# Altium PCB PiTopConn.PcbDoc
Units mm, origin at the board's own origin, x right, y up, seen from the top; angles counter-clockwise.
Board outline 31.88 x 68.88 mm, 2 copper layers (Top Layer, Bottom Layer), stack 1.071 mm thick; 13 components, 12 nets, 85 pads, 3 vias.
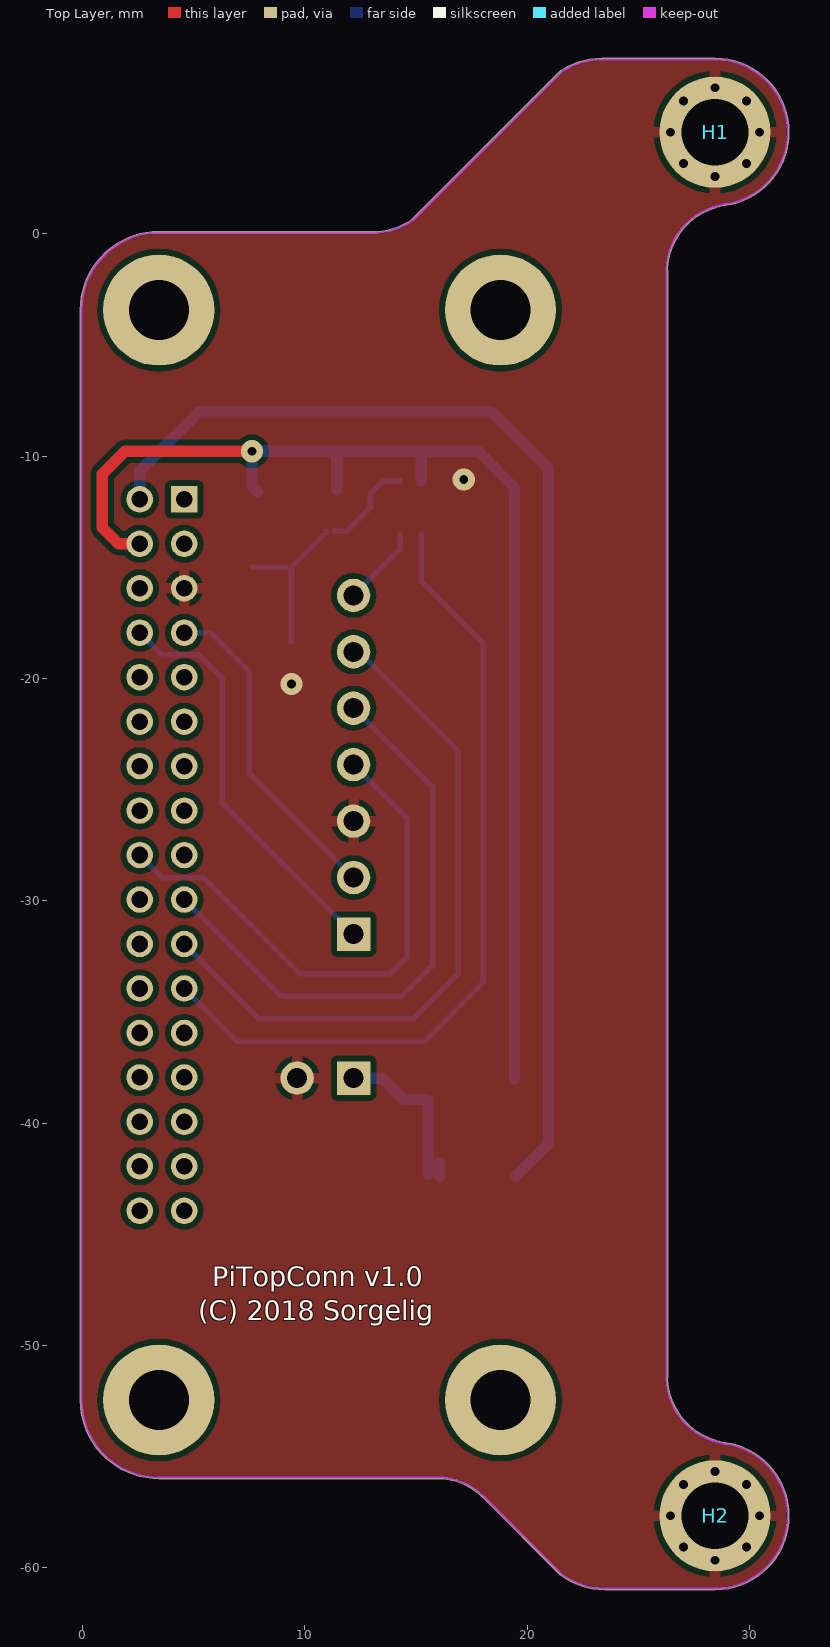
[diagram p0: Top Layer view]
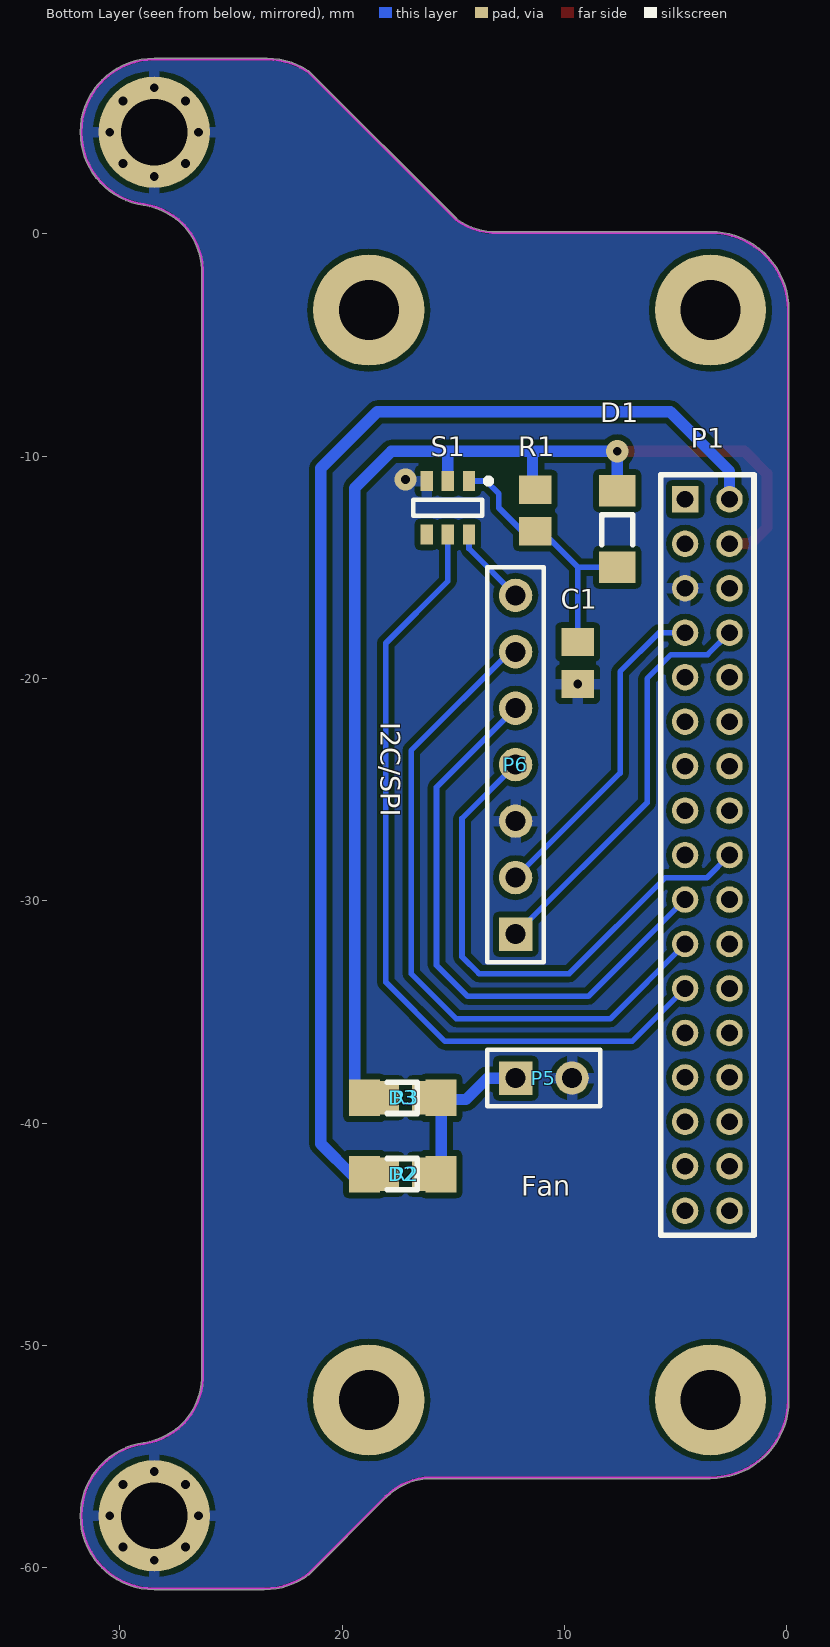
[diagram p1: Bottom Layer view, seen from below]
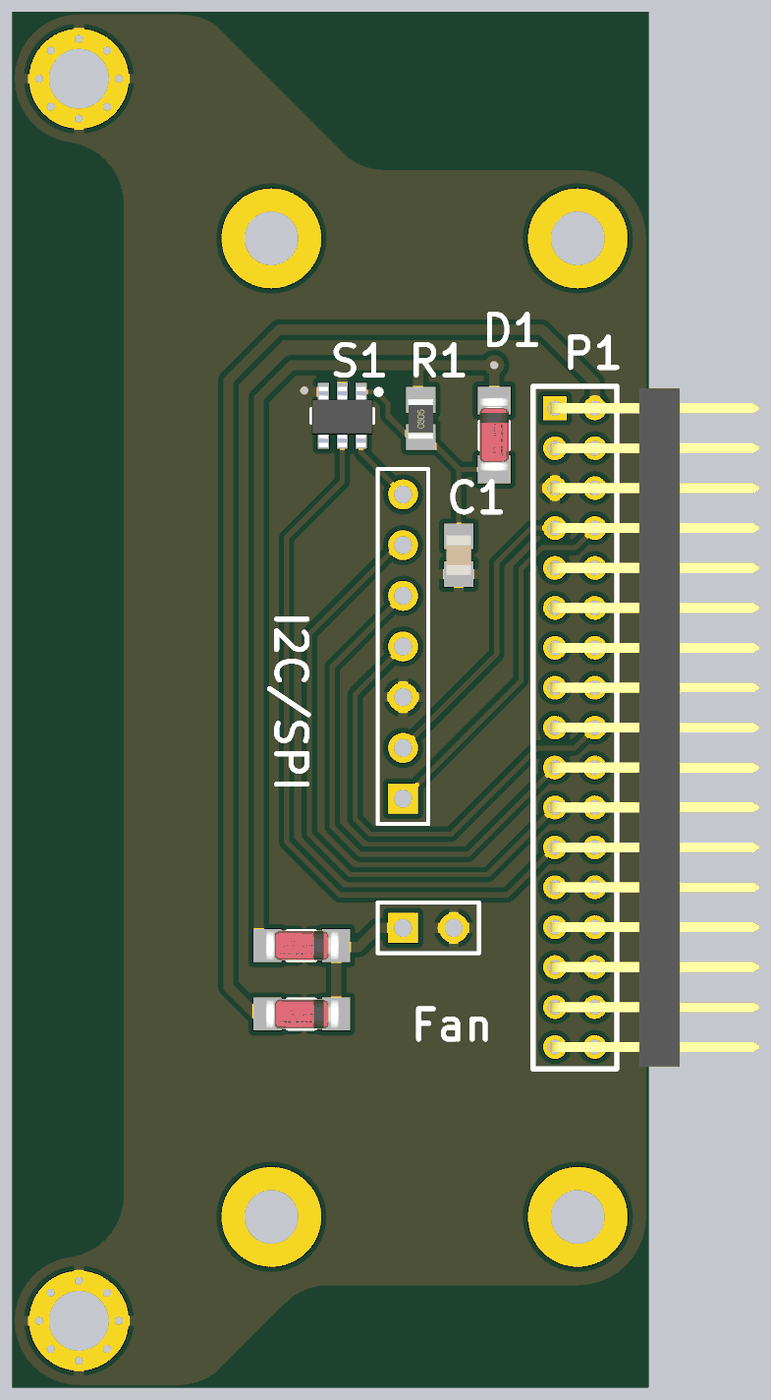
[diagram p2: 3D render of the assembled board from below, using the file's embedded part models]

## Layer stack, top to bottom
Top Solder: solder mask 0.0102, Solder Resist, Dk 3.5
Top Layer: signal copper 0.0356
Dielectric 1: dielectric 1, FR-4, Dk 4.8
Bottom Layer: signal copper 0.0356
Bottom Solder: solder mask 0.0102, Solder Resist, Dk 3.5

## Board outline
3.429,-55.983 16.002,-55.983 ccw(c15.972,-58.832) 16.001,-55.983 16.002,-55.983 cw(c15.972,-58.832) 17.993,-56.824 ccw(c18.029,-56.789) 18.016,-56.837 21.488,-60.309 ccw(c21.524,-60.273) 21.493,-60.313 ccw(c21.53,-60.278) 21.5,-60.319 ccw(c23.495,-57.658) 23.495,-60.984 ccw(c23.495,-60.933) 23.495,-60.984 ccw(c23.495,-60.933) 23.495,-60.984 28.448,-60.984 ccw(c28.448,-60.933) 28.449,-60.984 cw(c28.449,-60.933) 28.448,-60.984 28.449,-60.984 ccw(c28.448,-60.933) 28.449,-60.984 ccw(c28.449,-60.933) 28.449,-60.984 ccw(c28.448,-57.658) 31.774,-57.658 ccw(c31.723,-57.658) 31.774,-57.656 ccw(c31.723,-57.658) 31.774,-57.656 ccw(c31.723,-57.656) 31.774,-57.656 ccw(c28.448,-57.658) 28.91,-54.365 ccw(c28.903,-54.414) 28.91,-54.364 ccw(c29.332,-51.37) 28.91,-54.365 28.91,-54.364 cw(c29.332,-51.37) 26.309,-51.476 ccw(c26.259,-51.478) 26.309,-51.472 ccw(c26.262,-51.452) 26.313,-51.452 26.313,-1.634 ccw(c26.262,-1.634) 26.309,-1.614 ccw(c26.259,-1.608) 26.309,-1.61 cw(c29.332,-1.716) 28.911,1.279 ccw(c28.904,1.328) 28.912,1.279 ccw(c28.448,4.572) 31.774,4.572 ccw(c31.723,4.572) 31.774,4.574 ccw(c31.723,4.572) 31.774,4.574 cw(c31.723,4.574) 31.774,4.574 ccw(c31.723,4.574) 31.774,4.574 ccw(c28.448,4.572) 28.449,7.898 ccw(c28.449,7.847) 28.449,7.898 cw(c28.448,7.847) 28.449,7.898 ccw(c28.448,7.847) 28.448,7.898 23.368,7.898 ccw(c23.368,7.847) 23.366,7.898 ccw(c23.366,7.847) 23.366,7.898 ccw(c23.368,4.572) 21.535,7.347 ccw(c21.563,7.305) 21.519,7.33 ccw(c21.518,7.279) 21.483,7.315 14.844,0.676 ccw(c14.863,0.629) 14.833,0.669 cw(c13.132,2.934) 13.243,0.104 ccw(c13.245,0.053) 13.236,0.103 3.429,0.103 ccw(c3.429,-3.429) -0.103,-3.429 -0.103,-52.451 ccw(c3.429,-52.451)

## Design rules (kind name [scope] priority, off if disabled: settings)
BoardOutlineClearance [All] p1: gap=0 ignorepadtopadclearanceinfootprint=FALSE
Clearance keep-out_clearance [InNamedPolygon('ground') vs OnLayer('Keep-Out Layer')] p1: gap=0 ignorepadtopadclearanceinfootprint=FALSE
Clearance [All] p2: gap=0.254 ignorepadtopadclearanceinfootprint=TRUE except(0: Arc-Hole Track-Hole SMDPad-Hole THPad-Hole Via-Hole Fill-Hole Poly-Hole Region-Hole Text-Hole)
ComponentClearance [All] p1 off: gap=0.254 collisioncheckmode=3 verticalgap=0.254 showdistances=FALSE
Height [All] p1 off: minheight=0 maxheight=25.4 prefheight=12.7
HoleSize [All] p1: absolutevalues=TRUE maxlimit=6 minlimit=0.025 maxpercent=80.000 minpercent=20.000
MinimumSolderMaskSliver [All] p1: minsoldermaskwidth=0.25
PolygonConnect PolygonConnect_1 [IsVia] p1: connectstyle=Direct reliefconductorwidth=0.762 reliefentries=4 polygonreliefangle="90 Angle" airgapwidth=0.254
PolygonConnect [not IsVia] p2: connectstyle=Relief reliefconductorwidth=0.5 reliefentries=4 polygonreliefangle="90 Angle" airgapwidth=0.254
RoutingVias [All] p1: holewidth=0.4 width=1 viastyle="Through Hole" minholewidth=0.4 minwidth=1 maxholewidth=0.4 maxwidth=1
SilkToSolderMaskClearance [IsPad] p1 off: minsilkscreentomaskgap=0.127 clearancetoexposedcopper=TRUE
SolderMaskExpansion SolderMaskExpansion_U1 [InComponent('U1')] p1: expansion=0
SolderMaskExpansion [All] p2: expansion=0.051
Width Width_power [InNetClass('power')] p1: maxlimit=2 minlimit=0.254 preferedwidth=0.508 minimp=50.000000 maximp=50.000000 favimp=50.000000
Width Width_signal [All] p2: maxlimit=0.254 minlimit=0.254 preferedwidth=0.254
25 further rules are at their usual default settings.

## Classes and differential pairs
net class power: 3.3V 5V GND NetD2_2

## Components (designator, comment, footprint, x,y, rotation, side; value= is the part's Value field where it differs from the comment)
C1 "C0805" C0805 9.398,-19.304 r90 bottom value=10uF
D1 "1N4148" DIODE 7.62,-13.277 r270 bottom
D2 "Diode" DIODE 17.272,-42.291 r0 bottom
D3 "Diode" DIODE 17.272,-38.862 r0 bottom
H1 "M3" M3 28.448,4.572 r270 top locked
H2 "M3" M3 28.448,-57.658 r270 top locked
P1 "HDR17x2" HDR17X2_90 4.572,-11.94 r90 bottom locked
P5 "Fan" HDR1X2 12.192,-37.973 r180 bottom
P6 "I2C/SPI" HDR1X7 12.192,-31.496 r90 bottom
R1 "100K" R0805 11.303,-12.446 r90 bottom
R2 "10" 6-0805 17.145,-42.291 r180 bottom
R3 "10" 6-0805 17.145,-38.862 r180 bottom
S1 "STG719STR" SOT23-6_L 15.24,-12.319 r270 bottom

## Footprints (in the part's own frame and the unit in brackets; to place one, negate y for a bottom-side part, rotate by r counter-clockwise, add the part's x,y. Pads: shape width x height; smd on the part's side, far side on the other; paste and mask are expansions set on the pad)
6-0805 [mm] "Chip Resistor; Body 2 x 1.2 mm (LxW typ)"
  rect 1.3x1.5 smd: 1(-0.95,0) 2(0.95,0)
C0805 [mm] "Capacitor, Chip; 2.35 mm L X 1.35 mm W X 1.00 mm H body"
  rect 1.27x1.48 smd: 1(-0.945,0) 2(0.945,0)
  body extent -1,-0.63 1,0.62, height 0.58
DIODE [mm] "Diode, Chip; 4.05 mm L X 1.55 mm W X 1.50 mm H body"
  rect 1.4x1.65 smd: 1(1.72,0) 2(-1.72,0)
  silkscreen extent -0.65,-0.7 0.7,0.7, body extent -1.88,-0.8 1.82,0.8, height 1.6
HDR1X2 [mm] "Connector; Header; 2 Position"
  rect 1.5x1.5 hole 0.9: 1(0,0)
  round 1.5 hole 0.9: 2(2.54,0)
  silkscreen extent -1.27,-1.27 3.81,1.27
HDR1X7 [mm] "Connector; Header; 7 Position"
  rect 1.5x1.5 hole 0.9: 1(0,0)
  round 1.5 hole 0.9: 2(2.54,0) 3(5.08,0) 4(7.62,0) 5(10.16,0) 6(12.7,0) 7(15.24,0)
  silkscreen extent -1.27,-1.27 16.51,1.27
HDR17X2_90 [mm] "Header, Right Angle Post, 2.00 mm pitch; 0.50 mm lead width, 34 pins, 2 rows, 17 pins per row, 34.00 mm L X 2.00 mm W X 4.00 mm H body"
  rect 1.19x1.19 hole 0.75 paste-1.19: 1(0,0)
  round 1.19 hole 0.75 paste-1.19: 2(0,-2) 3(-2,0) 4(-2,-2) 5(-4,0) 6(-4,-2) 7(-6,0) 8(-6,-2) 9(-8,0) 10(-8,-2) 11(-10,0) 12(-10,-2) 13(-12,0) 14(-12,-2) 15(-14,0) 16(-14,-2) 17(-16,0) 18(-16,-2) 19(-18,0) 20(-18,-2) 21(-20,0) 22(-20,-2) 23(-22,0) 24(-22,-2) 25(-24,0) 26(-24,-2) 27(-26,0) 28(-26,-2) 29(-28,0) 30(-28,-2) 31(-30,0) 32(-30,-2) 33(-32,0) 34(-32,-2)
  silkscreen extent -33.1,-3.1 1.1,1.1, body extent -33,-10.24 1,0.25, height 4
M3 [mm] "Mounting Hole, Plated; 5.00 mm Pad, 3.00 mm Hole (with 8 vias)"
  round 0.6 hole 0.4 paste-0.6 mask-0.6: 1(-2,0) 1(-1.41,1.41) 1(-1.41,-1.41) 1(0,-2) 1(1.41,1.41) 1(1.41,-1.41) 1(2,0)
  round 0.6 hole 0.4 paste-0.4 mask-0.4: 1(0,2)
  round 5 hole 3: 1(0,0)
R0805 [mm] "Resistor, Chip; 2.32 mm L X 1.25 mm W X 1.00 mm H body"
  rect 1.29x1.47 smd: 1(-0.93,0) 2(0.93,0)
  body extent -1.03,-0.63 0.97,0.62, height 0.42
SOT23-6_L [mm] "SOT23, 6-Leads, Body 2.9x1.6mm, Pitch 0.95mm, Lead Span 2.7mm, IPC High Density"
  rect 0.9x0.56 smd mask+0.051: 1(-1.2,0.95) 2(-1.2,0) 3(-1.2,-0.95) 4(1.2,-0.95) 5(1.2,0) 6(1.2,0.95)
  silkscreen extent -1.32,-1.55 0.35,1.95, body extent -1.44,-1.52 1.56,1.53, height 1.37

## Part data
C1: "Ceramic Chip Capacitor - Standard", PackageDocument=Mar-2001, Code_IPC=2012[0805], Code_JEITA=0805, ComponentLink1Description="Manufacturer Link", ComponentLink1URL=http://www.kemet.com/, ComponentLink2Description=Datasheet, ComponentLink2URL=http://www.kemet.com/kemet/web/homepage/kechome.nsf/vapubfilesname/F3102TA.pdf/$file/F3102TA.pdf, DatasheetDocument=Mar-2001, LatestRevisionDate=19-Mar-2004, LatestRevisionNote="Silkscreen size reduced.", Note="Footprint corresponds to dimensions for bulk cassette packaging. This case size has tightened tolerances.", PackageReference=0805, Published=17-Jul-2002, Publisher="Altium Limited"
D1: library part Diode, "Default Diode", Code_JEDEC=DO-214-AB, LatestRevisionDate=17-Jul-2002, LatestRevisionNote="Re-released for DXP Platform.", PackageDescription="DO-214-AB/SMC; 2 C-Bend Leads; Body 7.9 x 5.9 mm, inc. leads (LxW)", PackageReference=SMC, PackageVersion=Sep-1996, Published=8-Jun-2000, Publisher="Altium Limited"
D2 D3: "Default Diode", Code_JEDEC=DO-214-AB, LatestRevisionDate=17-Jul-2002, LatestRevisionNote="Re-released for DXP Platform.", PackageDescription="DO-214-AB/SMC; 2 C-Bend Leads; Body 7.9 x 5.9 mm, inc. leads (LxW)", PackageReference=SMC, PackageVersion=Sep-1996, Published=8-Jun-2000, Publisher="Altium Limited"
P5: library part "Header 2", "Header, 2-Pin", LatestRevisionDate=17-Jul-2002, LatestRevisionNote="Re-released for DXP Platform.", Publisher="Altium Limited"
P6: library part "Header 7", "Header, 7-Pin", LatestRevisionDate=17-Jul-2002, LatestRevisionNote="Re-released for DXP Platform.", Publisher="Altium Limited"
R1 R2 R3: library part ERJ6RS, "Low Ohmic Value Thick Film Chip Resistor, 0.1 Ohm to 0.2 Ohm Range, 1%, 2% and 5% Tolerance, 0805 Size, 0.125 W", PackageDocument=Mar-2003, Code_IPC="2012 [0805]", ComponentLink1Description="Manufacturer Link", ComponentLink1URL=http://www.panasonic.com/industrial/components/resistive_products.htm, ComponentLink2Description=Datasheet, ComponentLink2URL=http://www.panasonic.com/industrial/components/pdf/AOA0000CE3.pdf, LatestRevisionDate=19-Mar-2004, LatestRevisionNote="Silkscreen size reduced.", PackageReference=6-0805, Published=17-Dec-2003, Publisher="Altium Limited"
S1: "STMICROELECTRONICS - STG719STR - IC, SWITCH, SPDT, SMD", Manufacturer_Name=STMicroelectronics, Datasheet Link=http://www.st.com/content/ccc/resource/technical/document/datasheet/10/33/73/59/23/59/49/0b/CD00002039.pdf/files/CD00002039.pdf/jcr:content/translations/en.CD00002039.pdf, Geometry.Height=1.45mm, Manufacturer_Part_Number=STG719STR, Supplier_Name=RS

## Free pads (board coordinates)
  round 5 hole 2.7: ""(3.429,-52.451) ""(3.429,-3.429) ""(18.796,-52.451) ""(18.796,-3.429)

## Via types
v1: diameter 1, hole 0.4, Top Layer to Bottom Layer, tented both sides, 3 vias

## Nets (pads, with @x,y where several pads share a name; then routed paths per layer and width w, separated by ;. In a path a pad name is that pad's centre, name@x,y a point inside that pad or via, vN(x,y) a via of type N, cw(c..) or ccw(c..) an arc to the next point about the centre after c; other vN are vias at no path point)
3.3V: D1.2 D3.1 P1.4 R1.2 R3.1 S1.2 | length 55.6
  Top Layer w0.508: P1.4 1.621,-13.94 0.889,-13.208 0.889,-10.795 1.905,-9.779 v1(7.62,-9.779)
  Bottom Layer w0.508: D1.2@7.874,-11.615 7.62,-11.361 v1(7.62,-9.779) 11.43,-9.779 ; R1.2@11.43,-11.516 11.43,-9.779 ; S1.2 15.24,-9.779 ; 19.431,-38.011 19.431,-11.43 17.78,-9.779 15.24,-9.779 ; 11.43,-9.779 13.335,-9.779 15.24,-9.779
5V: D2.1 P1.2 R2.1 | length 54.6
  Bottom Layer w0.508: P1.2@2.794,-11.718 P1.2 2.572,-10.665 5.237,-8.001 18.415,-8.001 20.955,-10.541 20.955,-40.925 D2.1@19.5,-42.38
GND: C1.1 H1.1 H2.1 P1.5 P5.2 P6.3 S1.3
  other v1: 9.398,-20.249 17.145,-11.049
MISO: P1.19 P6.5 | length 26.6
  Bottom Layer w0.254: P1.19 8.922,-34.29 14.351,-34.29 15.748,-32.893 15.748,-24.892 P6.5
MOSI: P1.18 P6.4 | length 24.2
  Bottom Layer w0.254: P1.18 3.596,-28.964 5.469,-28.964 9.779,-33.274 13.843,-33.274 14.605,-32.512 14.605,-26.289 P6.4
NetC1_2: C1.2 D1.1 R1.1 S1.1 | length 11.7
  Bottom Layer w0.254: D1.1 9.387,-14.997 9.398,-14.986 ; C1.2 9.398,-14.986 ; R1.1@10.947,-13.376 10.947,-13.437 9.398,-14.986 ; R1.1 11.897,-13.376 12.954,-12.319 12.954,-11.684 13.519,-11.119 S1.1
NetD2_2: D2.2 D3.2 P5.1 R2.2 R3.2 | length 8.3
  Bottom Layer w0.508: P5.1@12.318,-37.973 13.462,-37.973 14.425,-38.936 15.542,-38.936 15.542,-42.301 D2.2 16.06,-41.783 D2.2@16.06,-42.38
NetP1_23: P1.23 S1.5 | length 36.8
  Bottom Layer w0.254: P1.23 6.954,-36.322 15.367,-36.322 18.034,-33.655 18.034,-18.415 15.24,-15.621 S1.5
SCK: P1.21 P6.6 | length 31.1
  Bottom Layer w0.254: P1.21 7.938,-35.306 14.859,-35.306 16.891,-33.274 16.891,-23.241 P6.6@12.319,-18.669
SCL: P1.8 P6.1 | length 18.5
  Bottom Layer w0.254: P1.8 3.555,-18.923 5.207,-18.923 6.28,-19.996 6.28,-25.584 P6.1
SDA: P1.7 P6.2 | length 14.9
  Bottom Layer w0.254: P1.7 5.748,-17.94 7.493,-19.685 7.493,-24.257 P6.2
SS: P6.7 S1.6 | length 3.6
  Bottom Layer w0.254: P6.7 14.29,-14.158 S1.6
pads on no net: P1.1 P1.3 P1.6 P1.9 P1.10 P1.11 P1.12 P1.13 P1.14 P1.15 P1.16 P1.17 P1.20 P1.22 P1.24 P1.25 P1.26 P1.27 P1.28 P1.29 P1.30 P1.31 P1.32 P1.33 P1.34 S1.4

## Polygon pours and split planes (outlines as drawn)
GND on Top Layer "ground" (solid, remove dead copper, pour order 24): 3.429,-55.983 16.002,-55.983 ccw(c15.966,-58.815) 16.001,-55.983 16.002,-55.983 cw(c15.972,-58.832) 17.993,-56.824 ccw(c18.029,-56.789) 18.016,-56.837 21.488,-60.309 ccw(c21.524,-60.273) 21.493,-60.313 ccw(c21.53,-60.278) 21.5,-60.319 ccw(c23.495,-57.658) 23.495,-60.984 ccw(c23.495,-60.933) 23.495,-60.984 ccw(c23.495,-60.933) 23.495,-60.984 28.448,-60.984 ccw(c28.448,-60.933) 28.449,-60.984 cw(c28.449,-60.933) 28.448,-60.984 28.449,-60.984 ccw(c28.449,-60.946) 28.449,-60.984 ccw(c28.449,-60.929) 28.449,-60.984 ccw(c28.448,-57.658) 31.774,-57.658 ccw(c31.723,-57.658) 31.774,-57.656 ccw(c31.72,-57.656) 31.774,-57.656 ccw(c31.724,-57.656) 31.774,-57.656 ccw(c28.448,-57.658) 28.91,-54.365 ccw(c28.903,-54.414) 28.91,-54.364 ccw(c29.338,-51.368) 28.91,-54.365 28.91,-54.364 cw(c29.332,-51.37) 26.309,-51.476 ccw(c26.259,-51.478) 26.309,-51.472 ccw(c26.262,-51.452) 26.313,-51.452 26.313,-1.634 ccw(c26.262,-1.634) 26.309,-1.614 ccw(c26.259,-1.608) 26.309,-1.61 cw(c29.332,-1.716) 28.911,1.279 ccw(c28.904,1.328) 28.912,1.279 ccw(c28.448,4.572) 31.774,4.572 ccw(c31.723,4.572) 31.774,4.574 ccw(c31.725,4.574) 31.774,4.574 cw(c31.722,4.574) 31.774,4.574 ccw(c31.722,4.574) 31.774,4.574 ccw(c28.448,4.572) 28.449,7.898 ccw(c28.449,7.846) 28.449,7.898 cw(c28.449,7.832) 28.449,7.898 ccw(c28.448,7.847) 28.448,7.898 23.368,7.898 ccw(c23.368,7.847) 23.366,7.898 ccw(c23.366,7.846) 23.366,7.898 ccw(c23.368,4.572) 21.535,7.347 ccw(c21.563,7.305) 21.519,7.33 ccw(c21.518,7.279) 21.483,7.315 14.844,0.676 ccw(c14.863,0.629) 14.833,0.669 cw(c13.132,2.934) 13.243,0.104 ccw(c13.245,0.053) 13.236,0.103 3.429,0.103 ccw(c3.429,-3.429) -0.103,-3.429 -0.103,-52.451 ccw(c3.429,-52.451)
GND on Bottom Layer "ground" (solid, remove dead copper, pour order 25): 3.429,-55.983 16.002,-55.983 ccw(c15.966,-58.815) 16.001,-55.983 16.002,-55.983 cw(c15.972,-58.832) 17.993,-56.824 ccw(c18.029,-56.789) 18.016,-56.837 21.488,-60.309 ccw(c21.524,-60.273) 21.493,-60.313 ccw(c21.53,-60.278) 21.5,-60.319 ccw(c23.495,-57.658) 23.495,-60.984 ccw(c23.495,-60.933) 23.495,-60.984 ccw(c23.495,-60.933) 23.495,-60.984 28.448,-60.984 ccw(c28.448,-60.933) 28.449,-60.984 cw(c28.449,-60.933) 28.448,-60.984 28.449,-60.984 ccw(c28.449,-60.946) 28.449,-60.984 ccw(c28.449,-60.929) 28.449,-60.984 ccw(c28.448,-57.658) 31.774,-57.658 ccw(c31.723,-57.658) 31.774,-57.656 ccw(c31.72,-57.656) 31.774,-57.656 ccw(c31.724,-57.656) 31.774,-57.656 ccw(c28.448,-57.658) 28.91,-54.365 ccw(c28.903,-54.414) 28.91,-54.364 ccw(c29.338,-51.368) 28.91,-54.365 28.91,-54.364 cw(c29.332,-51.37) 26.309,-51.476 ccw(c26.259,-51.478) 26.309,-51.472 ccw(c26.262,-51.452) 26.313,-51.452 26.313,-1.634 ccw(c26.262,-1.634) 26.309,-1.614 ccw(c26.259,-1.608) 26.309,-1.61 cw(c29.332,-1.716) 28.911,1.279 ccw(c28.904,1.328) 28.912,1.279 ccw(c28.448,4.572) 31.774,4.572 ccw(c31.723,4.572) 31.774,4.574 ccw(c31.725,4.574) 31.774,4.574 cw(c31.722,4.574) 31.774,4.574 ccw(c31.722,4.574) 31.774,4.574 ccw(c28.448,4.572) 28.449,7.898 ccw(c28.449,7.846) 28.449,7.898 cw(c28.449,7.832) 28.449,7.898 ccw(c28.448,7.847) 28.448,7.898 23.368,7.898 ccw(c23.368,7.847) 23.366,7.898 ccw(c23.366,7.846) 23.366,7.898 ccw(c23.368,4.572) 21.535,7.347 ccw(c21.563,7.305) 21.519,7.33 ccw(c21.518,7.279) 21.483,7.315 14.844,0.676 ccw(c14.863,0.629) 14.833,0.669 cw(c13.132,2.934) 13.243,0.104 ccw(c13.245,0.053) 13.236,0.103 3.429,0.103 ccw(c3.429,-3.429) -0.103,-3.429 -0.103,-52.451 ccw(c3.429,-52.451)

## Keep-outs
Keep-Out Layer:
  lines w0.1: 13.245,0.052 3.429,0.052 ccw(c3.429,-3.429) -0.052,-3.429 -0.052,-52.451 ccw(c3.429,-52.451) 3.429,-55.932 16.002,-55.932 cw(c15.972,-58.832) 18.029,-56.789 ; 13.245,0.053 ccw(c13.132,2.934) 14.863,0.629 ; 14.866,0.627 21.518,7.279 ; 18.034,-56.784 21.524,-60.273 ; 21.524,-60.274 21.524,-60.273 ; 21.518,7.279 cw(c21.589,7.208) 21.563,7.305 cw(c23.368,4.572) 23.366,7.847 cw(c23.368,7.797) 23.368,7.847 28.448,7.847 ; 21.518,7.279 ccw(c21.589,7.208) 21.518,7.279 ; 21.524,-60.273 ccw(c21.56,-60.238) 21.53,-60.278 ccw(c23.495,-57.658) 23.495,-60.933 ; 23.495,-60.933 23.495,-60.933 ; 23.495,-60.933 23.495,-60.933 ; 23.495,-60.933 28.448,-60.933 ; 26.262,-51.453 cw(c26.163,-51.453) 26.259,-51.478 ccw(c29.332,-51.37) 28.903,-54.414 cw(c28.448,-57.658) 31.723,-57.656 cw(c31.673,-57.658) 31.723,-57.658 cw(c28.448,-57.658) 28.449,-60.933 ; 26.262,-51.453 ccw(c26.163,-51.453) 26.262,-51.453 ; 26.262,-51.453 ccw(c26.163,-51.453) 26.262,-51.452 ; 26.262,-51.452 ccw(c26.163,-51.453) 26.262,-51.452 ; 26.262,-51.453 ccw(c26.212,-51.452) 26.262,-51.452 ; 26.262,-51.452 26.262,-1.634 ccw(c26.212,-1.634) 26.262,-1.631 ccw(c26.163,-1.633) 26.259,-1.608 cw(c29.332,-1.716) 28.904,1.328 ccw(c28.897,1.378) 28.905,1.329 ccw(c28.448,4.572) 31.723,4.572 ccw(c31.673,4.572) 31.723,4.574 ccw(c28.448,4.572) 28.449,7.847 ; 28.448,-60.933 ccw(c28.448,-57.658) 28.449,-60.933 ; 28.448,-60.933 ccw(c28.448,-60.883) 28.449,-60.933 ; 28.449,7.847 ccw(c28.448,7.797) 28.448,7.847 ; 28.449,7.847 ccw(c28.448,4.572) 28.448,7.847

## Silkscreen, mask and mechanical layers (free items; w line width, h text height)
Top Overlay:
  text "PiTopConn v1.0" at 5.842,-47.625 h1.52
  text "(C) 2018 Sorgelig" at 5.207,-49.149 h1.52